# EAGLE board charlie heart (EAGLE 6.5.0)
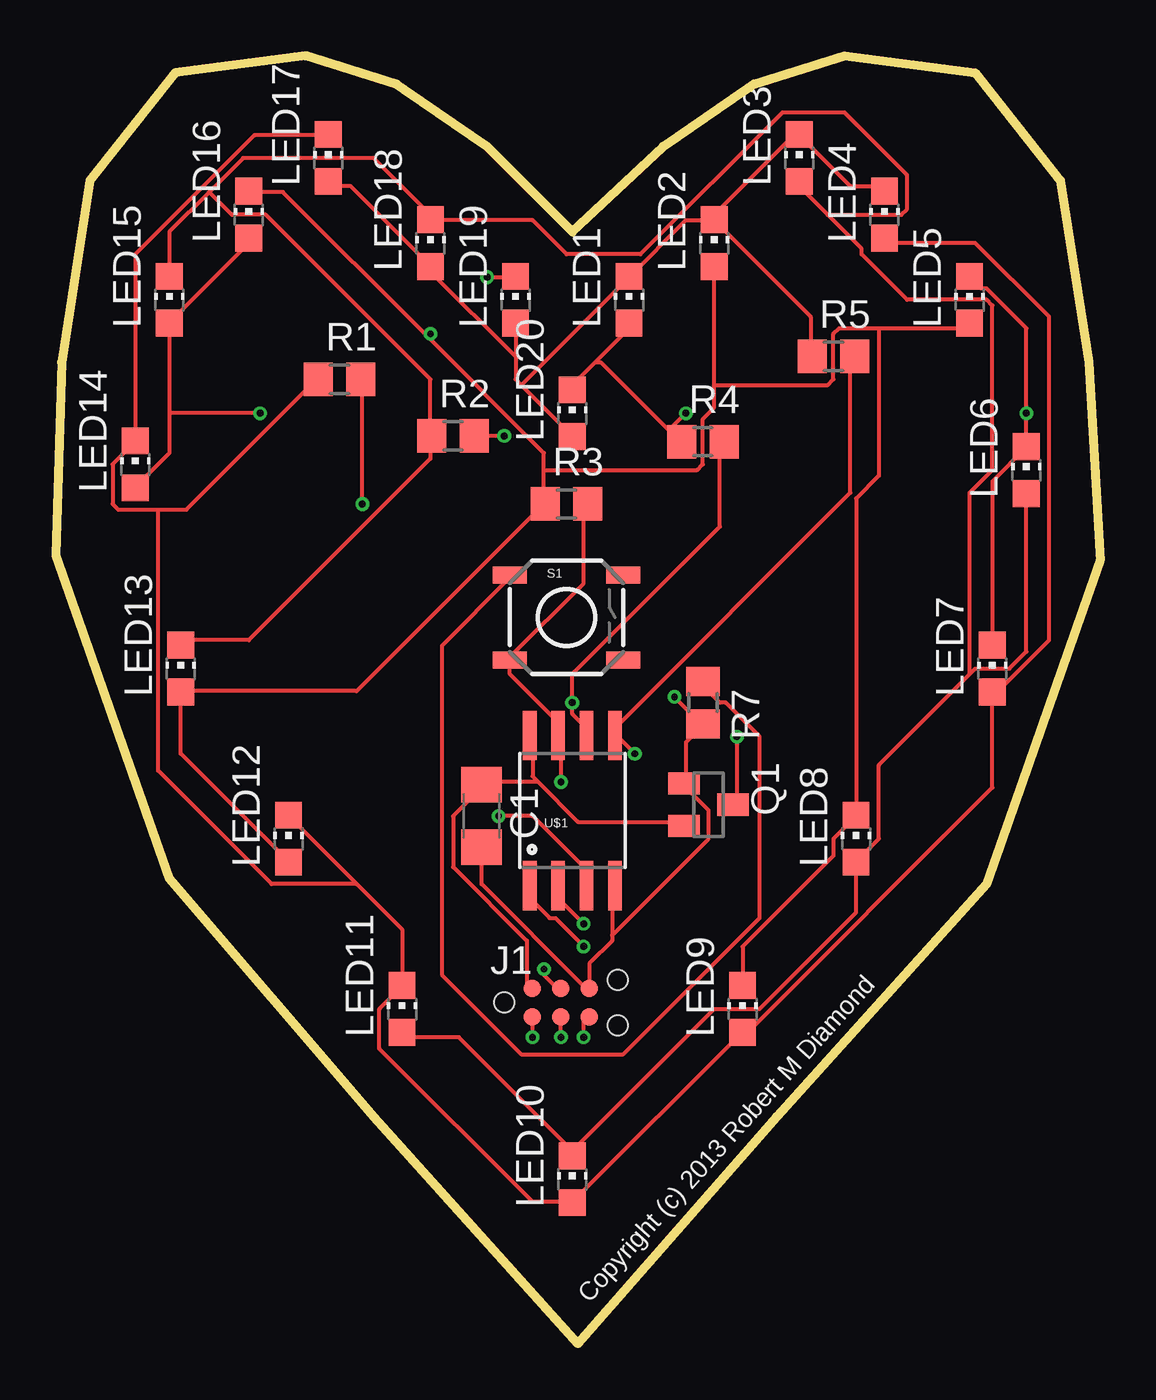
[diagram p0: board, top side]
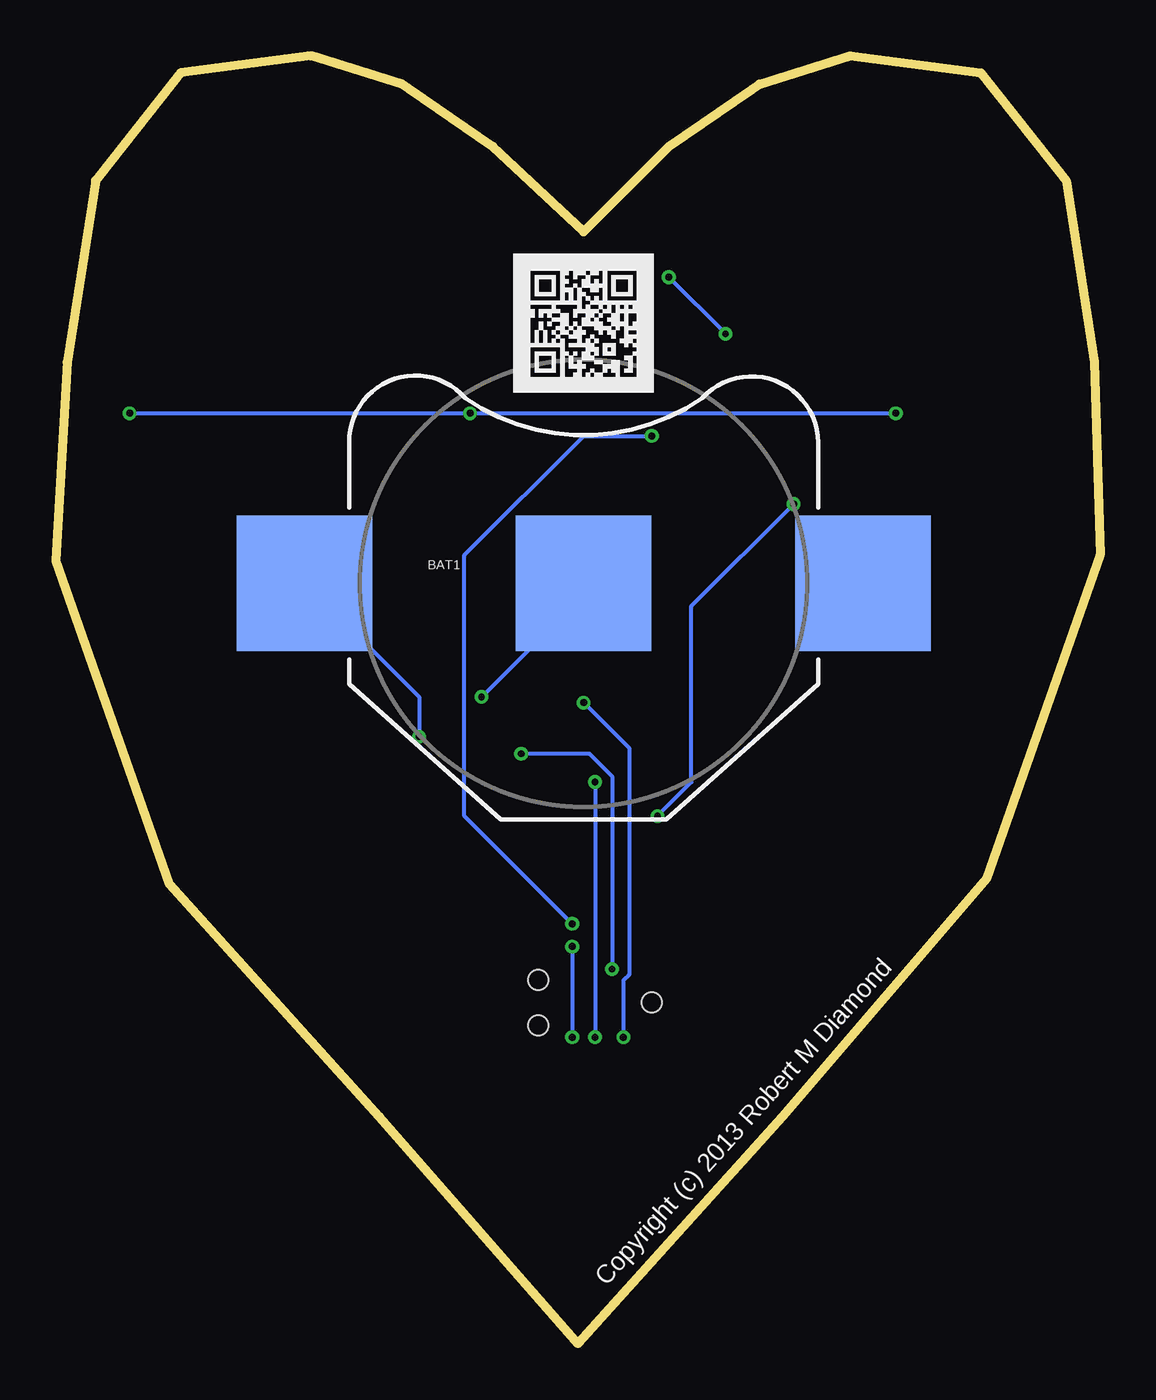
[diagram p1: board, bottom side, seen from below]

Size 46.74 x 57.66 mm. Coordinates in mm from the lower left corner, seen from the top.
Outline: 23.11,49.78 27.18,53.59 31.24,56.39 35.31,57.66 41.15,56.9 44.96,52.07 46.23,43.94 46.74,35.05 41.66,20.57 32.26,10.16 23.37,0 14.22,10.16 5.08,20.83 0,35.31 0.25,43.94 1.52,52.07 5.33,56.9 11.18,57.66 15.24,56.39 19.3,53.59 23.11,49.78
Copper layers (1*16): Top 0.035mm / dielectric 1.5mm / Bottom 0.035mm
Design rules "EagleRules": minimum track width 7mil, minimum drill 12mil, track to track 7mil, track to pad 7mil, pad to pad 7mil, via to via 7mil, smd to smd 0mil, copper to edge 20mil, drill to drill 10mil, minimum pad ring 10mil, minimum via ring 6mil, stop-mask expansion 2mil, vias tented up to drill 25mil, thermal gap 10mil

## Footprints (pad centres in the part's own frame; a part is rotated, then mirrored left to right if it is on the bottom)
BATTCON_20MM = smd 6.07 x 6.07: 1 -12.5,0; 2 0,0; 3 12.5,0
C1206 = smd 1.6 x 1.8: 1 -1.4,0; 2 1.4,0
TC2030-MCP-NL = smd 0.787 x 0.787: 1 1.27,-0.635; 2 1.27,0.635; 3 2.54,-0.635; 4 2.54,0.635; 5 3.81,-0.635; 6 3.81,0.635 | hole 0.889: 0,0; 5.08,-1.016; 5.08,1.016
CHIP-LED0805 = smd 1.2 x 1.2: A 0,-1.05; C 0,1.05
SOT23 = smd 1 x 1.4: 1 -0.95,-1.1; 2 0.95,-1.1; 3 0,1.1
R0805 = smd 1.3 x 1.5: 1 -0.95,0; 2 0.95,0
TACTILE_SWITCH_SMD = smd 1.524 x 0.762: 1 -2.54,1.905; 2 2.54,1.905; 3 -2.54,-1.905; 4 2.54,-1.905
SO08-EIAJ = smd 0.61 x 2.21: 1 -1.905,-3.378; 2 -0.635,-3.378; 3 0.635,-3.378; 4 1.905,-3.378; 5 1.905,3.353; 6 0.635,3.353; 7 -0.635,3.353; 8 -1.905,3.353

## Placement (x,y rotation side)
BAT1  cr2032  [BATTCON_20MM]  23.11,34.04 0 bottom
C1  .1u  [C1206]  19.05,23.62 270 top
J1  [TC2030-MCP-NL]  20.06,15.27 0 top
LED1  [CHIP-LED0805]  25.65,46.74 0 top
LED2  [CHIP-LED0805]  29.46,49.28 0 top
LED3  [CHIP-LED0805]  33.27,53.09 0 top
LED4  [CHIP-LED0805]  37.08,50.55 0 top
LED5  [CHIP-LED0805]  40.89,46.74 0 top
LED6  [CHIP-LED0805]  43.43,39.12 0 top
LED7  [CHIP-LED0805]  41.91,30.23 0 top
LED8  [CHIP-LED0805]  35.81,22.61 0 top
LED9  [CHIP-LED0805]  30.73,14.99 0 top
LED10  [CHIP-LED0805]  23.11,7.37 0 top
LED11  [CHIP-LED0805]  15.49,14.99 0 top
LED12  [CHIP-LED0805]  10.41,22.61 0 top
LED13  [CHIP-LED0805]  5.59,30.23 0 top
LED14  [CHIP-LED0805]  3.56,39.37 0 top
LED15  [CHIP-LED0805]  5.08,46.74 0 top
LED16  [CHIP-LED0805]  8.64,50.55 0 top
LED17  [CHIP-LED0805]  12.19,53.09 0 top
LED18  [CHIP-LED0805]  16.76,49.28 0 top
LED19  [CHIP-LED0805]  20.57,46.74 0 top
LED20  [CHIP-LED0805]  23.11,41.66 0 top
Q1  BSS84  [SOT23]  29.21,24.13 270 top
R1  3  [R0805]  12.7,43.18 0 top
R2  3  [R0805]  17.78,40.64 0 top
R3  3  [R0805]  22.86,37.59 0 top
R4  3  [R0805]  28.96,40.39 0 top
R5  3  [R0805]  34.8,44.2 0 top
R7  1k  [R0805]  28.96,28.7 270 top
S1  [TACTILE_SWITCH_SMD]  22.86,32.51 0 top
U$1  ATTINY45  [SO08-EIAJ]  23.11,23.88 0 top

## Library data of the parts
BAT1 S1 U$1 = SparkFun
C1 R1-R5 R7 = rcl
J1 = tag-connect
LED1-LED20 = led
Q1 = transistor-small-signal

## Nets
2.8V: C1.1 J1.2 Q1.2 U$1.8
GND: BAT1.2 C1.2 J1.6 Q1.1 R7.2 U$1.4
LEDCONTROL0: LED1.C LED2.C LED3.C LED4.C LED17.A LED18.A LED19.A LED20.A R5.1
LEDCONTROL1: LED1.A LED5.C LED6.C LED7.C LED14.A LED15.A LED16.A LED20.C R4.1
LEDCONTROL2: LED2.A LED5.A LED8.C LED9.C LED12.A LED13.A LED16.C LED19.C R3.1
LEDCONTROL3: LED3.A LED6.A LED8.A LED10.C LED11.A LED13.C LED15.C LED18.C R2.1
LEDCONTROL4: LED4.A LED7.A LED9.A LED10.A LED11.C LED12.C LED14.C LED17.C R1.1
MISO: J1.1 R4.2 U$1.6
MOSI: J1.4 R5.2 U$1.5
N$2: BAT1.1 Q1.3
N$3: R7.1 S1.1
N$4: R2.2 U$1.2
N$6: R1.2 U$1.3
PB2/SCK: J1.3 R3.2 S1.3 U$1.7
RESET: J1.5 U$1.1

## Tracks (layer width: path | path; a pad name or v marks a point on that pad's centre or on a via)
2.8V
  Top 0.178: J1.2 21.08,16 21.08,18.03 17.78,21.34 17.78,23.62 19.05,24.89 C1.1 19.05,25.15 21.59,25.15 | 21.59,25.15 21.34,25.4 21.34,27.18 U$1.8 | 21.59,25.15 23.37,23.37 27.94,23.37 Q1.2
GND  (via drill 0.3)
  Top 0.178: 28.96,27.69 28.19,26.92 28.19,25.15 Q1.1 28.19,24.89 29.21,23.88 29.21,22.61 24.89,18.29 | 24.89,18.29 24.89,20.32 U$1.4 | 24.89,18.29 24.89,18.03 23.88,17.02 23.88,16 J1.6 23.62,16 19.05,20.57 C1.2 | 28.96,27.69 v27.69,28.96 | 28.96,27.69 R7.2
  Bottom 0.178: BAT1.2 23.11,33.53 v27.69,28.96
LEDCONTROL0
  Top 0.178: LED4.C 37.08,51.82 35.56,51.82 33.27,54.1 LED3.C 33.27,54.36 29.46,50.55 LED2.C 29.46,50.29 | 29.46,50.29 33.78,45.97 33.78,44.2 R5.1 | 20.83,42.93 20.57,43.18 20.57,44.2 | 20.83,42.93 23.11,40.64 LED20.A | LED19.A 20.57,44.2 | 20.57,44.2 16.76,48.01 LED18.A 16.76,48.26 13.21,51.82 12.19,51.82 LED17.A | 20.83,42.93 25.65,47.75 | 29.46,50.29 28.19,50.29 25.65,47.75 | 25.65,47.75 LED1.C
LEDCONTROL1  (via drill 0.3)
  Top 0.178: 5.08,41.66 LED15.A 5.08,45.72 8.64,49.28 LED16.A | 5.08,41.66 5.08,39.88 3.56,38.35 LED14.A | 24.13,43.94 25.65,45.47 LED1.A | 24.13,43.94 23.11,42.93 LED20.C | 27.43,40.89 24.38,43.94 24.13,43.94 | 27.43,40.89 27.94,40.39 R4.1 27.43,40.89 | LED7.C 41.91,38.61 43.43,40.13 LED6.C v43.43,41.66 43.43,45.47 41.66,47.24 41.4,47.24 40.89,47.75 LED5.C | v28.19,41.66 27.43,40.89 | v9.14,41.66 5.08,41.66
  Bottom 0.178: v43.43,41.66 v28.19,41.66 v9.14,41.66
LEDCONTROL2  (via drill 0.3)
  Top 0.178: LED9.C 30.73,17.78 34.8,21.84 34.8,22.61 35.81,23.62 LED8.C 35.81,37.85 36.83,38.86 36.83,45.47 | LED12.A 10.41,21.59 5.59,26.42 LED13.A 5.59,29.21 13.46,29.21 21.84,37.59 | 16.51,45.21 21.84,39.88 21.84,39.12 | 16.51,45.21 10.16,51.56 8.64,51.56 LED16.C | 21.84,37.59 21.84,39.12 | v19.3,47.75 20.57,47.75 LED19.C | 16.51,45.21 v16.76,45.21 | 29.46,42.93 29.46,41.91 28.96,41.4 28.96,39.37 28.7,39.12 21.84,39.12 | 29.46,42.93 LED2.A | 36.83,45.47 35.05,45.47 34.8,45.21 34.8,43.18 34.54,42.93 29.46,42.93 | 36.83,45.47 40.89,45.47 LED5.A | 21.84,37.59 R3.1
  Bottom 0.178: v16.76,45.21 v19.3,47.75
LEDCONTROL3
  Top 0.178: LED15.C 5.08,49.78 6.86,51.56 | 6.86,51.56 8.38,53.09 14.22,53.09 16.76,50.55 LED18.C 16.76,50.29 21.34,50.29 22.86,48.77 26.16,48.77 32.51,55.12 35.31,55.12 38.1,52.32 38.1,50.8 37.85,50.55 34.54,50.55 | 16.76,40.64 16.76,39.62 8.64,31.5 5.59,31.5 LED13.C | 6.86,51.56 7.87,50.55 9.4,50.55 16.76,43.18 16.76,40.64 | 16.76,40.64 R2.1 | 23.11,8.64 18.03,13.72 15.49,13.72 LED11.A | 23.11,8.64 29.46,14.99 31.5,14.99 35.81,19.3 LED8.A 35.81,21.59 36.83,22.61 36.83,25.91 40.89,29.97 | 23.11,8.64 LED10.C | LED6.A 43.43,30.99 42.67,30.23 41.15,30.23 40.89,29.97 | 34.54,50.55 36.07,49.02 36.07,48.77 38.1,46.74 41.66,46.74 41.91,46.48 41.91,39.12 40.89,38.1 40.89,29.97 | 34.54,50.55 33.27,51.82 LED3.A
LEDCONTROL4
  Top 0.178: LED17.C 12.19,54.1 8.89,54.1 3.56,48.77 LED14.C 3.56,40.39 2.54,39.37 2.54,37.59 2.79,37.34 4.57,37.34 | 4.57,37.34 5.84,37.34 11.68,43.18 R1.1 | 13.46,20.57 10.41,23.62 LED12.C | 13.46,20.57 15.49,18.54 LED11.C 15.49,16 14.48,14.99 14.48,13.21 21.34,6.35 23.11,6.35 | 23.11,6.35 30.73,13.97 LED9.A 30.73,13.72 41.91,24.89 41.91,28.96 | 41.91,28.96 44.45,31.5 44.45,45.97 41.15,49.28 37.08,49.28 LED4.A | 41.91,28.96 LED7.A | 23.11,6.35 LED10.A | 4.57,37.34 4.57,25.65 9.65,20.57 13.46,20.57
MISO  (via drill 0.3)
  Top 0.178: v21.34,13.72 21.34,14.48 J1.1 | U$1.6 23.88,27.43 23.11,28.19 v23.11,28.7 23.11,29.97 29.72,36.58 29.72,40.39 R4.2
  Bottom 0.178: v21.34,13.72 21.34,16.26 21.08,16.51 21.08,26.67 v23.11,28.7
MOSI  (via drill 0.3)
  Top 0.178: v21.84,16.76 21.84,16.51 22.35,16 J1.4 | v25.91,26.42 25.15,27.18 U$1.5 24.89,27.43 35.56,38.1 35.56,44.2 R5.2
  Bottom 0.178: v21.84,16.76 21.84,25.4 22.86,26.42 v25.91,26.42
N$2  (via drill 0.3)
  Top 0.178: v30.48,27.18 30.48,24.13 Q1.3
  Bottom 0.178: v30.48,27.18 30.48,28.96 35.56,34.04 BAT1.1
N$3
  Top 0.178: R7.1 28.96,29.46 29.72,28.7 29.97,28.7 31.5,27.18 31.5,19.05 25.4,12.95 20.83,12.95 17.27,16.51 17.27,31.24 20.32,34.29 S1.1
N$4  (via drill 0.3)
  Top 0.178: v20.07,40.64 R2.2 | v23.62,18.8 22.61,19.81 22.61,20.32 U$1.2
  Bottom 0.178: v20.07,40.64 23.11,40.64 28.45,35.31 28.45,23.62 v23.62,18.8
N$6  (via drill 0.3)
  Top 0.178: v13.72,37.59 13.72,43.18 R1.2 | v19.81,23.62 21.34,23.62 23.62,21.34 23.62,20.57 U$1.3
  Bottom 0.178: v13.72,37.59 18.29,33.02 18.29,25.15 v19.81,23.62
PB2/SCK  (via drill 0.3)
  Top 0.178: R3.2 23.62,37.59 23.62,34.04 20.32,30.73 S1.3 20.32,29.97 22.35,27.94 22.35,27.43 U$1.7 22.61,27.18 v22.61,25.15 | v22.61,13.72 22.61,14.48 J1.3
  Bottom 0.178: v22.61,25.15 v22.61,13.72
RESET  (via drill 0.3)
  Top 0.178: v23.62,13.72 23.62,14.48 J1.5 | v23.62,17.78 22.35,19.05 22.1,19.05 21.34,19.81 21.34,20.32 U$1.1
  Bottom 0.178: v23.62,17.78 v23.62,13.72

## Text on the board
tNames: Copyright (c) 2013 Robert M Diamond
bNames: Copyright (c) 2013 Robert M Diamond